# EAGLE board Keyboard Instrument (EAGLE 9.7.0)

Size 121.24 x 149.43 mm. Coordinates in mm from the lower left corner, seen from the top.
Outline: 0,0 121.24,0 121.24,149.43 0,149.43 0,0
Copper layers (1*16): Top 0.035mm / dielectric 1.5mm / Bottom 0.035mm
Design rules "default": minimum track width 6mil, minimum drill 0.35mm, track to track 6mil, track to pad 6mil, pad to pad 6mil, via to via 6mil, smd to smd 6mil, copper to edge 40mil, drill to drill 6mil, minimum pad ring 10mil, minimum via ring 8mil, stop-mask expansion 4mil, vias tented up to drill 0mil, thermal gap 10mil

## Footprints (pad centres in the part's own frame; a part is rotated, then mirrored left to right if it is on the bottom)
PIEZO = drill 1 pad 1.6: 1 -3.5,0; 2 3.5,0
RESAD1016W63L850D250B = drill 0.83 pad 1.43: 1 -5.08,0; 2 5.08,0
SWITCH-MOMENTARY-PTH-6.5MM = drill 1.016 pad 1.88: 1 -3.251,2.261; 2 3.251,2.261; 3 -3.251,-2.261; 4 3.251,-2.261
ARDUINO-UNO-R3-SHIELD = drill 1.016 pad 1.88: 3.3V 24.13,-2.54; 5V 24.13,0; A0 24.13,12.7; A1 24.13,15.24; A2 24.13,17.78; A3 24.13,20.32; A4 24.13,22.86; A5 24.13,25.4; AREF -24.13,-13.97; D2 -24.13,20.32; D3 -24.13,17.78; D4 -24.13,15.24; D5 -24.13,12.7; D6 -24.13,10.16; D7 -24.13,7.62; D8 -24.13,3.81; D9 -24.13,1.27; D10 -24.13,-1.27; D11 -24.13,-3.81; D12 -24.13,-6.35; D13 -24.13,-8.89; GND@0 24.13,2.54; GND@1 24.13,5.08; GND@2 -24.13,-11.43; IOREF 24.13,-7.62; NC 24.13,-10.16; RES 24.13,-5.08; RX -24.13,25.4; SCL -24.13,-19.05; SDA -24.13,-16.51; TX -24.13,22.86; VIN 24.13,7.62

## Placement (x,y rotation side)
PIEZO1  PIEZO  [PIEZO]  107.66,137.14 90 top
R1  10905  [RESAD1016W63L850D250B]  92.42,11.41 0 top
R13  1k  [RESAD1016W63L850D250B]  94.96,6.33 0 top
R14  4988  [RESAD1016W63L850D250B]  92.42,21.57 0 top
R15  3000  [RESAD1016W63L850D250B]  92.42,31.73 0 top
R16  2003  [RESAD1016W63L850D250B]  92.42,41.89 0 top
R17  1398.6  [RESAD1016W63L850D250B]  92.42,52.05 0 top
R18  1000  [RESAD1016W63L850D250B]  92.42,62.21 0 top
R19  709  [RESAD1016W63L850D250B]  92.42,72.37 0 top
R20  499  [RESAD1016W63L850D250B]  92.42,82.53 0 top
R21  332  [RESAD1016W63L850D250B]  92.42,92.69 0 top
R22  199  [RESAD1016W63L850D250B]  92.42,102.85 0 top
R23  90  [RESAD1016W63L850D250B]  92.42,113.01 0 top
S1  SWITCH_MOMENTARY  [SWITCH-MOMENTARY-PTH-6.5MM]  111.47,8.87 180 top
S2  SWITCH_MOMENTARY  [SWITCH-MOMENTARY-PTH-6.5MM]  111.47,120.63 180 top
S3  SWITCH_MOMENTARY  [SWITCH-MOMENTARY-PTH-6.5MM]  111.47,110.47 180 top
S4  SWITCH_MOMENTARY  [SWITCH-MOMENTARY-PTH-6.5MM]  111.47,100.31 180 top
S5  SWITCH_MOMENTARY  [SWITCH-MOMENTARY-PTH-6.5MM]  111.47,49.51 0 top
S6  SWITCH_MOMENTARY  [SWITCH-MOMENTARY-PTH-6.5MM]  111.47,69.83 0 top
S7  SWITCH_MOMENTARY  [SWITCH-MOMENTARY-PTH-6.5MM]  111.47,29.19 0 top
S8  SWITCH_MOMENTARY  [SWITCH-MOMENTARY-PTH-6.5MM]  111.47,59.67 0 top
S9  SWITCH_MOMENTARY  [SWITCH-MOMENTARY-PTH-6.5MM]  111.47,39.35 0 top
S10  SWITCH_MOMENTARY  [SWITCH-MOMENTARY-PTH-6.5MM]  111.47,79.99 0 top
S11  SWITCH_MOMENTARY  [SWITCH-MOMENTARY-PTH-6.5MM]  111.47,90.15 0 top
S12  SWITCH_MOMENTARY  [SWITCH-MOMENTARY-PTH-6.5MM]  111.47,19.03 0 top
U1  ARDUINO-UNO-R3-SHIELD  [ARDUINO-UNO-R3-SHIELD]  29.84,101.55 180 top

## Library data of the parts
PIEZO1 R1 R13-R23 S1-S12 U1 = Tinkercad

## Nets
S1_3: R1.2 S1.3 S1.4
S3_3: R23.2 S3.3 S3.4
S4_3: R22.2 S4.3 S4.4
S5_2: R17.2 S5.1 S5.2
S6_2: R19.2 S6.1 S6.2
S7_2: R15.2 S7.1 S7.2
S8_2: R18.2 S8.1 S8.2
S9_2: R16.2 S9.1 S9.2
S10_2: R20.2 S10.1 S10.2
S11_2: R21.2 S11.1 S11.2
S12_2: R14.2 S12.1 S12.2
U1_5V: R1.1 R14.1 R15.1 R16.1 R17.1 R18.1 R19.1 R20.1 R21.1 R22.1 R23.1 S2.3 S2.4 U1.5V
U1_A5: R13.2 S1.1 S1.2 S2.1 S2.2 S3.1 S3.2 S4.1 S4.2 S5.3 S5.4 S6.3 S6.4 S7.3 S7.4 S8.3 S8.4 S9.3 S9.4 S10.3 S10.4 S11.3 S11.4 S12.3 S12.4 U1.A5
U1_D8: PIEZO1.1 U1.D8
U1_GND: PIEZO1.2 R13.1 U1.GND@0 U1.GND@1 U1.GND@2

## Tracks (layer width: path | path; a pad name or v marks a point on that pad's centre or on a via)
S1_3  (2 unrouted)
S3_3  (2 unrouted)
S4_3  (2 unrouted)
S5_2  (2 unrouted)
S6_2  (2 unrouted)
S7_2  (2 unrouted)
S8_2  (2 unrouted)
S9_2  (2 unrouted)
S10_2  (2 unrouted)
S11_2  (2 unrouted)
S12_2  (2 unrouted)
U1_5V  (13 unrouted)
U1_A5  (25 unrouted)
U1_D8  (1 unrouted)
U1_GND  (4 unrouted)